# EAGLE board driver (EAGLE 9.5.2)
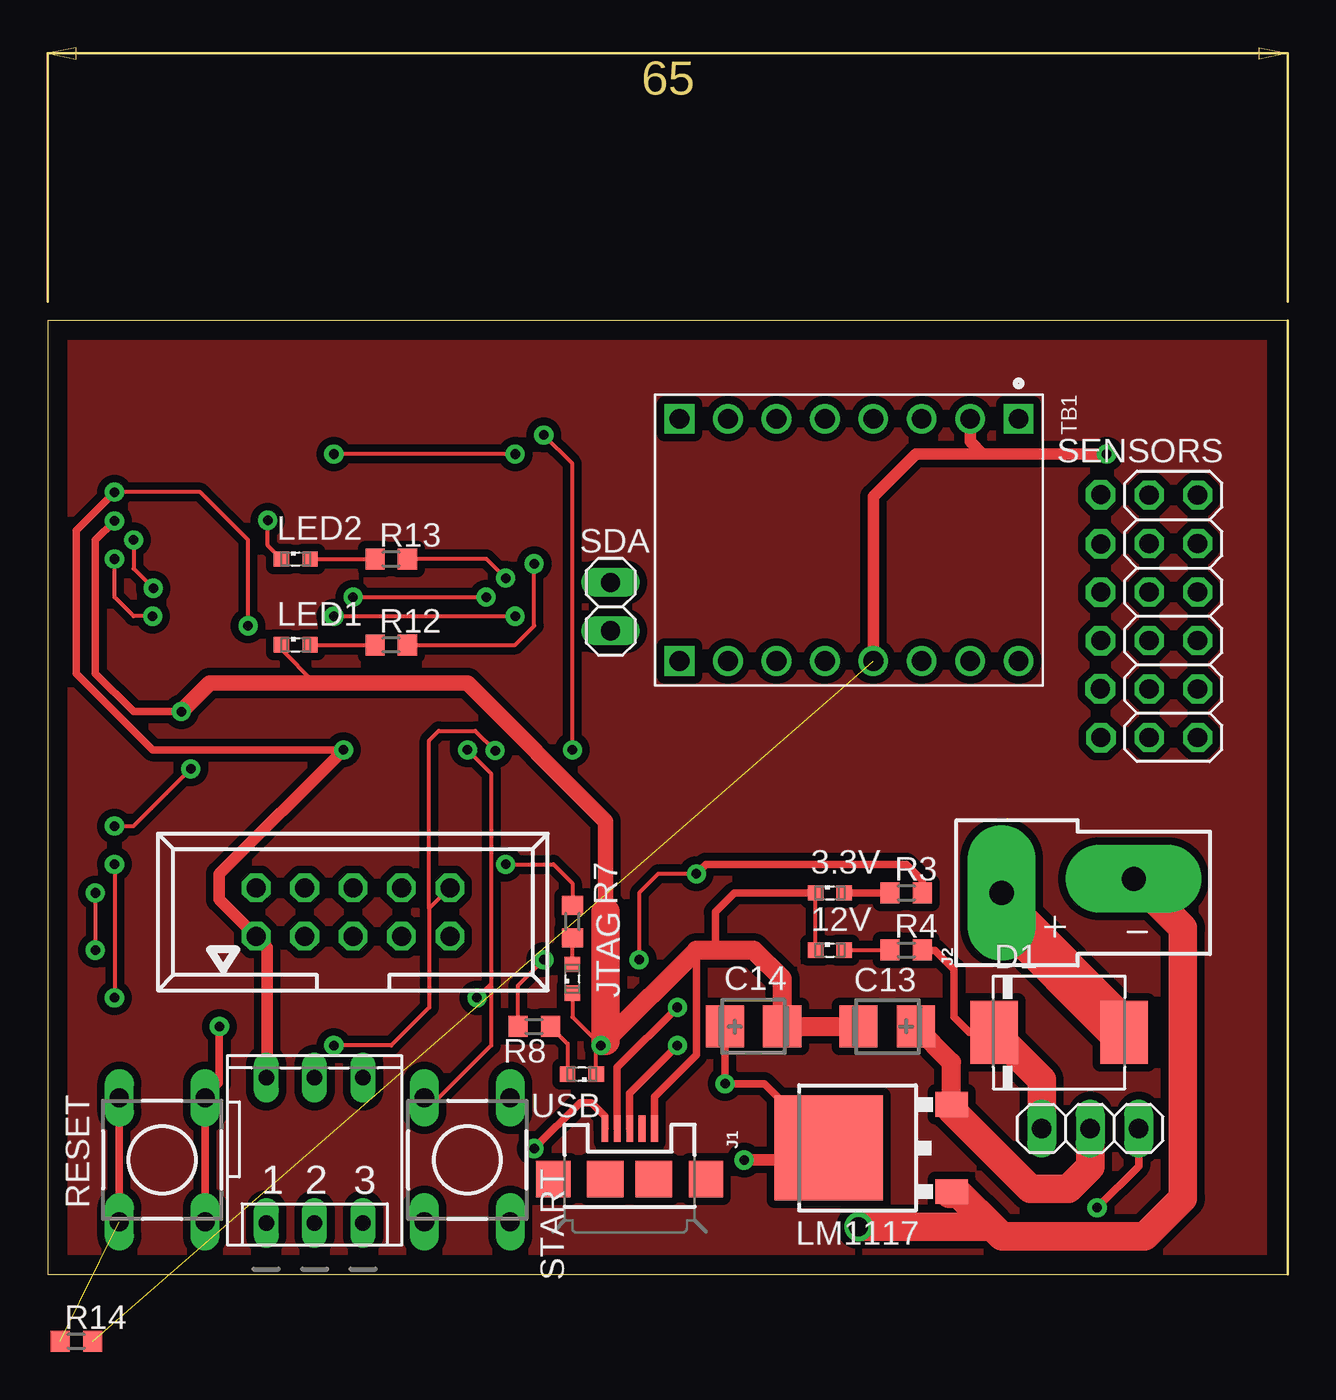
[diagram p0: board, top side]
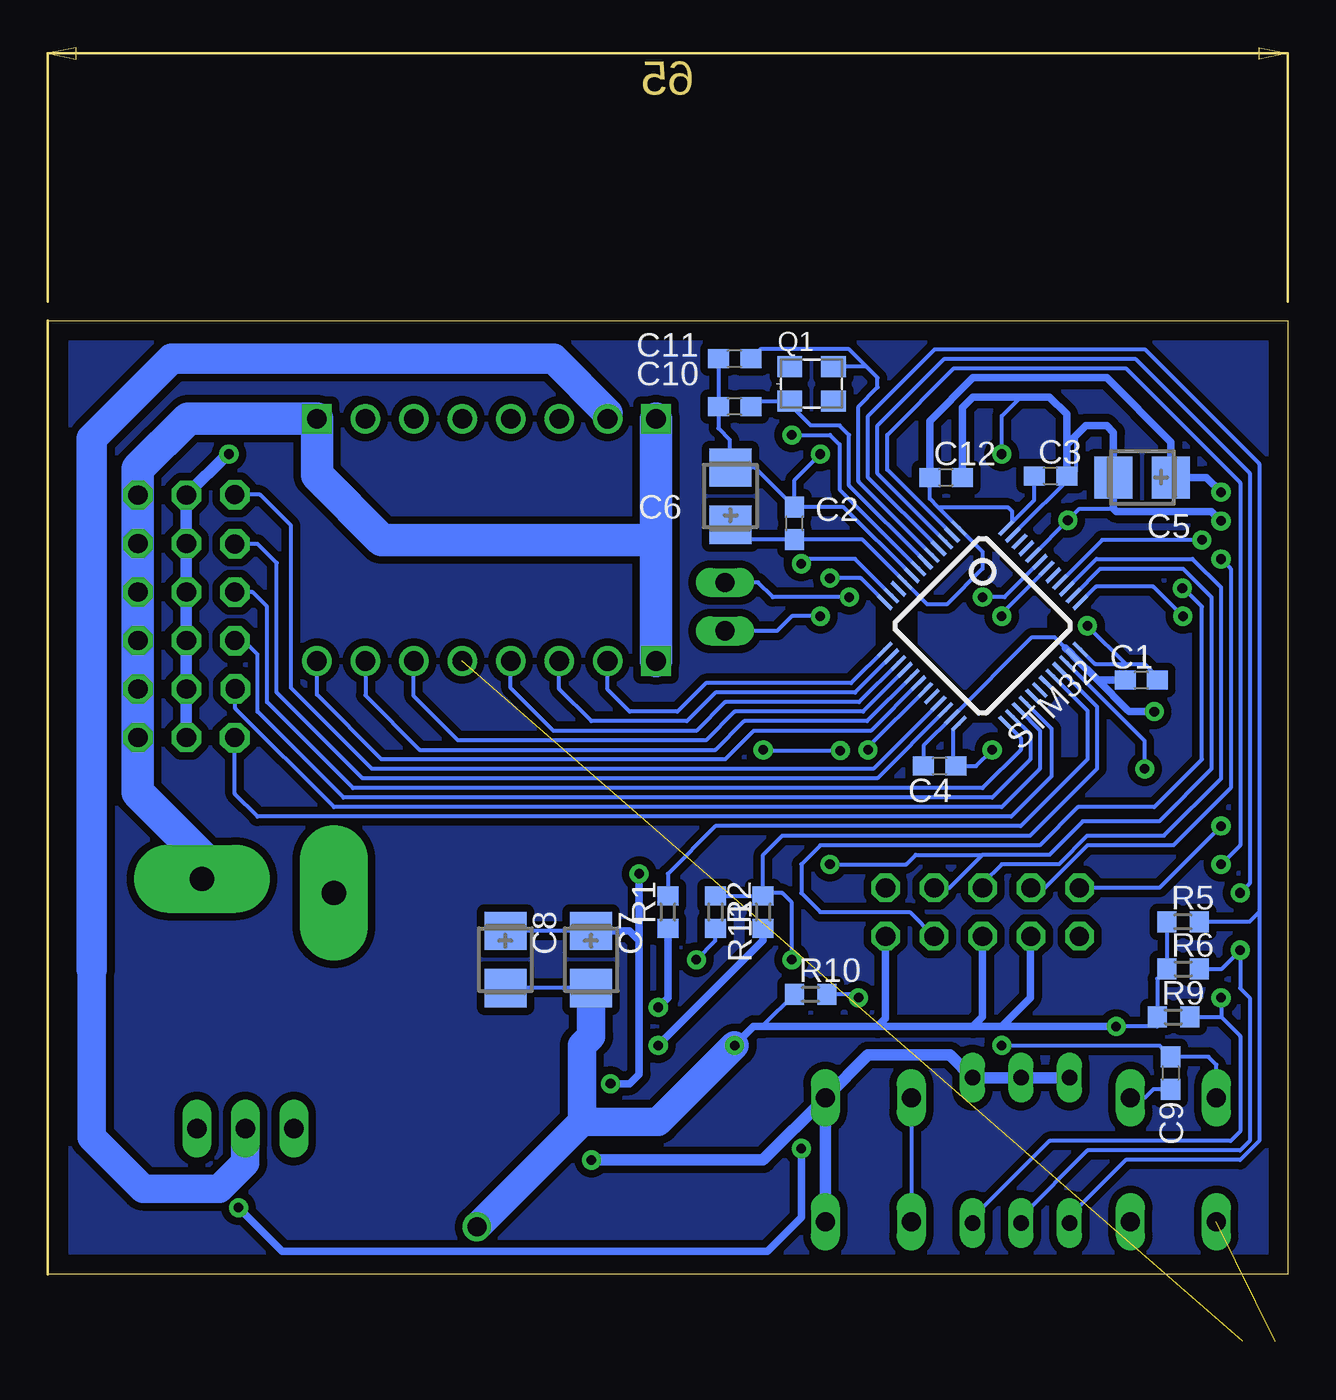
[diagram p1: board, bottom side, seen from below]

Size 65 x 50 mm. Coordinates in mm from the lower left corner, seen from the top.
Outline: 0,0 65,0 65,50 0,50 0,0
Copper layers (1*16): Top 0.035mm / dielectric 1.5mm / Bottom 0.035mm
Design rules "default *": minimum track width 6mil, minimum drill 0.35mm, track to track 0.4mm, track to pad 0.4mm, pad to pad 0.4mm, via to via 0.4mm, smd to smd 0.4mm, copper to edge 40mil, drill to drill 6mil, minimum pad ring 10mil, minimum via ring 8mil, stop-mask expansion 4mil, vias tented up to drill 0mil, thermal gap 10mil

## Footprints (pad centres in the part's own frame; a part is rotated, then mirrored left to right if it is on the bottom)
SML0603 = smd 0.8 x 0.8: A 0.75,0; C -0.75,0
C0603 = smd 1.1 x 1: 1 -0.85,0; 2 0.85,0
CT3528 = smd 2 x 2.2: + -1.5,0; - 1.5,0
DO214AB = smd 2.5 x 3.3: A 3.4,0; C -3.4,0
USB-MICROB = smd 1.4 x 0.35: D+ -2.65,0; D- -2.65,-0.65; GND -2.65,1.3; ID -2.65,0.65; VBUS -2.65,-1.3 | smd 1.9 x 1.8: MT1 0,-4; MT2 0,4 | smd 1.9 x 1.9: P$1 0,-1.27; P$2 0,1.27
DEANS = drill 1.27 pad 3.556 long: + 0,0; - 0.737,-6.921
1X03 = drill 1.016 long: 1 -2.54,0; 2 0,0; 3 2.54,0
TO252 = smd 1.3 x 1.7: 1 -2.285,-4.22; 2 2.285,-4.22 | smd 5.5 x 5.7: 3 0,2.22
3.2X2.5_KX-7 = smd 1.3 x 1.1: 1 -1.15,-0.9; 2 1.15,-0.9; 3 1.15,0.9; 4 -1.15,0.9
R0603 = smd 1 x 1.1: 1 -0.85,0; 2 0.85,0
DTS-6 = drill 1 long: 1 -3.25,2.25; 2 3.25,2.25; 3 -3.25,-2.25; 4 3.25,-2.25
DP-03 = drill 0.813 long: 1 -2.54,-3.81; 2 0,-3.81; 3 2.54,-3.81; 4 2.54,3.81; 5 0,3.81; 6 -2.54,3.81
1X02 = drill 1.016 long: 1 -1.27,0; 2 1.27,0
2X06 = drill 1.016 octagon: 1 -6.35,-1.27; 2 -6.35,1.27; 3 -3.81,-1.27; 4 -3.81,1.27; 5 -1.27,-1.27; 6 -1.27,1.27; 7 1.27,-1.27; 8 1.27,1.27; 9 3.81,-1.27; 10 3.81,1.27; 11 6.35,-1.27; 12 6.35,1.27
TQFP48 = smd 0.2 x 1: 1 -2.75,-4.5; 2 -2.25,-4.5; 3 -1.75,-4.5; 4 -1.25,-4.5; 5 -0.75,-4.5; 6 -0.25,-4.5; 7 0.25,-4.5; 8 0.75,-4.5; 9 1.25,-4.5; 10 1.75,-4.5; 11 2.25,-4.5; 12 2.75,-4.5; 25 2.75,4.5; 26 2.25,4.5; 27 1.75,4.5; 28 1.25,4.5; 29 0.75,4.5; 30 0.25,4.5; 31 -0.25,4.5; 32 -0.75,4.5; 33 -1.25,4.5; 34 -1.75,4.5; 35 -2.25,4.5; 36 -2.75,4.5 | smd 1 x 0.2: 13 4.5,-2.75; 14 4.5,-2.25; 15 4.5,-1.75; 16 4.5,-1.25; 17 4.5,-0.75; 18 4.5,-0.25; 19 4.5,0.25; 20 4.5,0.75; 21 4.5,1.25; 22 4.5,1.75; 23 4.5,2.25; 24 4.5,2.75; 37 -4.5,2.75; 38 -4.5,2.25; 39 -4.5,1.75; 40 -4.5,1.25; 41 -4.5,0.75; 42 -4.5,0.25; 43 -4.5,-0.25; 44 -4.5,-0.75; 45 -4.5,-1.25; 46 -4.5,-1.75; 47 -4.5,-2.25; 48 -4.5,-2.75
SHIELD_POLOLU-713 = drill 1.04 square: 1 -6.35,8.89; 8 -6.35,-8.89; 9 6.35,-8.89 | drill 1.04: 2 -6.35,6.35; 3 -6.35,3.81; 4 -6.35,1.27; 5 -6.35,-1.27; 6 -6.35,-3.81; 7 -6.35,-6.35; 10 6.35,-6.35; 11 6.35,-3.81; 12 6.35,-1.27; 13 6.35,1.27; 14 6.35,3.81; 15 6.35,6.35; 16 6.35,8.89
057-010-1 = drill 1 octagon: 1 -5.08,-1.27; 2 -5.08,1.27; 3 -2.54,-1.27; 4 -2.54,1.27; 5 0,-1.27; 6 0,1.27; 7 2.54,-1.27; 8 2.54,1.27; 9 5.08,-1.27; 10 5.08,1.27

## Placement (x,y rotation side)
3.3V  [SML0603]  41,20 0 top
12V  [SML0603]  41,17 0 top
C1  [C0603]  7.68,31.15 180 bottom
C2  [C0603]  25.85,39.37 90 bottom
C3  [C0603]  12.44,41.85 0 bottom
C4  [C0603]  18.25,26.65 180 bottom
C5  [CT3528]  7.64,41.78 180 bottom
C6  [CT3528]  29.22,40.79 90 bottom
C7  [CT3528]  36.51,16.51 270 bottom
C8  [CT3528]  41.01,16.51 270 bottom
C9  [C0603]  6.15,10.56 270 bottom
C10  [C0603]  29,45.5 180 bottom
C11  [C0603]  29,48 180 bottom
C12  [C0603]  17.92,41.77 0 bottom
C13  10u  [CT3528]  44,13 180 top
C14  10u  [CT3528]  37,13 0 top
D1  S3A  [DO214AB]  53.01,12.69 0 top
J1  [USB-MICROB]  30.5,5 270 top
J2  [DEANS]  50,20 90 top
JP3  [1X03]  54.64,7.65 180 top
JTAG  [SML0603]  27.5,15.5 90 top
LED1  [SML0603]  13,33 0 top
LED2  [SML0603]  13,37.5 0 top
LM1117  LM1117DT-3.3  [TO252]  43.15,6.63 90 top
Q1  [3.2X2.5_KX-7]  24.96,46.69 0 bottom
R1  20  [R0603]  32.5,19 90 bottom
R2  20  [R0603]  27.5,19 90 bottom
R3  65  [R0603]  45,20 0 top
R4  500  [R0603]  45,17.01 0 top
R5  1k  [R0603]  5.5,18.49 0 bottom
R6  1k  [R0603]  5.49,16.01 0 bottom
R7  65  [R0603]  27.5,18.5 90 top
R8  65  [R0603]  25.5,13 180 top
R9  1k  [R0603]  6,13.5 0 bottom
R10  1k  [R0603]  25.01,14.69 0 bottom
R11  1k5  [R0603]  30,19 270 bottom
R12  65  [R0603]  18,33 0 top
R13  65  [R0603]  18,37.5 0 top
R14  1k  [R0603]  1.5,-3.5 0 top  (outside the outline)
RESET  DTS-6  [DTS-6]  6,6.01 90 top
S2  [DP-03]  13.99,6.51 0 top
SDA  [1X02]  29.5,35 90 top
SENSORS  [2X06]  59,34.5 90 top
START  DTS-6  [DTS-6]  21.99,6.01 270 top
STM32  STM32F10XCXT6  [TQFP48]  16,34 225 bottom
TB1  POLOLU-713  [SHIELD_POLOLU-713]  42,38.5 270 top
TCLK  057-010-1  [057-010-1]  16,19 0 top
USB  [SML0603]  28,10.5 180 top

## Library data of the parts
3.3V 12V JTAG LED1 LED2 USB = led; SPICEPREFIX: D
C1-C14 = rcl; SPICEPREFIX: C
D1 = s3x_10; MF: Fairchild; MPN: S3A; OC_FARNELL: 1017803; OC_NEWARK: 58K2395
J1 = SparkFun-Connectors; PROD_ID: CONN-09505; SF_ID: PRT-08533
J2 = SparkFun-Connectors; SF_ID: PRT-11864
JP3 SDA SENSORS = pinhead
LM1117 = lm1117_10; MF: Texas Instruments; MPN: LM1117DT-3.3; OC_FARNELL: 1469048; OC_NEWARK: 41K3430
Q1 = crystal-geyer_V1_0
R1-R14 = rcl; SPICEPREFIX: R
RESET START = switch-tact
S2 = switch-dil; MPN: MCDP03; OC_FARNELL: 1522004; OC_NEWARK: 74M2976
STM32 = stm32
TB1 = POLOLU-713; AVAILABILITY: Unavailable; DESCRIPTION: DC-motor driver; IC: TB6612FNG; 100kHz; 1A; Uin mot: 4.5; MF: Pololu; MP: POLOLU-713; PACKAGE: None; PRICE: None
TCLK = con-panduit; OC_FARNELL: unknown; OC_NEWARK: unknown

## Nets
12V: D1.C JP3.3 R4.2
BAT+: D1.A J2.+
BUT: R10.2 START.3 START.4 STM32.19
D+: R2.2 R8.2 R11.1 STM32.33
D-: R1.2 STM32.32
GND: 3.3V.C 12V.C C1.2 C2.2 C3.2 C4.2 C5.- C6.- C7.- C8.- C9.2 C10.2 C11.2 C12.2 C13.- C14.- J1.GND J2.- JTAG.C LED1.C LED2.C LM1117.1 R5.1 R6.1 R9.1 R10.1 RESET.3 RESET.4 SENSORS.1 SENSORS.3 SENSORS.5 SENSORS.7 SENSORS.9 SENSORS.11 STM32.8 STM32.23 STM32.35 STM32.44 STM32.47 TB1.1 TB1.8 TB1.9 TCLK.3 TCLK.5 TCLK.9 USB.C
LED1: R12.2 STM32.11
LED2: R13.2 STM32.12
MA1: STM32.16 TB1.14
MA2: STM32.17 TB1.15
MB1: STM32.15 TB1.12
MB2: STM32.14 TB1.11
N$1: 3.3V.A R3.1
N$2: 12V.A R4.1
N$3: C11.1 Q1.3 STM32.5
N$4: C10.1 Q1.1 STM32.6
N$5: LED1.A R12.1
N$6: J1.D+ R2.1
N$7: J1.D- R1.1
N$8: LED2.A R13.1
N$10: JTAG.A R7.1
N$11: R8.1 USB.A
N$17: STM32.29
N$42: TB1.5
N$43: TB1.6
N$44: TB1.4
N$45: TB1.3
NRST: C9.1 R14.1 RESET.1 RESET.2 STM32.7 TCLK.10
PC13: R9.2 S2.3 STM32.2
PC14: R6.2 S2.2 STM32.3
PC15: R5.2 S2.1 STM32.4
PWMA: STM32.18 TB1.16
PWMB: STM32.13 TB1.10
S0: STM32.21
S1: STM32.22
S2: STM32.25
S3: STM32.26
S4: STM32.27
S5: STM32.28
SCL: SDA.1 STM32.42
SDA: SDA.2 STM32.43
STAB: C13.+ JP3.2 LM1117.2 TB1.7
TCLK: STM32.37 TCLK.4
TDI: R7.2 STM32.38 TCLK.8
TDO: STM32.39 TCLK.6
TMS: STM32.34 TCLK.2
TRST: STM32.40 TCLK.7
VBUS: J1.VBUS JP3.1
VCC: R14.2 SENSORS.2 SENSORS.4 SENSORS.6 SENSORS.8 SENSORS.10 SENSORS.12 TB1.2 TB1.13
VDD: C1.1 C2.1 C3.1 C4.1 C5.+ C6.+ C7.+ C8.+ C12.1 C14.+ LM1117.3 R3.2 R11.2 S2.4 S2.5 S2.6 START.1 START.2 STM32.1 STM32.9 STM32.24 STM32.36 STM32.48 TCLK.1

## Tracks (layer width: path | path; a pad name or v marks a point on that pad's centre or on a via)
12V
  Top 0.4: R4.2 46.5,17 47.5,16 47.5,13.5 48.31,12.69 D1.C
  Top 1.5: JP3.3 52.1,10.2 D1.C
BAT+
  Top 2.5: D1.A 50,19.1 J2.+
BUT  (via drill 0.5 pad 1)
  Top 0.2: v22,27.5 23.23,26.27 23.23,15.23 | 23.23,15.23 23.24,12 20.47,9.23 19.77,9.23 START.3 | 23.23,15.23 v22.5,14.5
  Bottom 0.2: v22.5,14.5 22.69,14.69 R10.2 | STM32.19 22,27.65 v22,27.5 | START.3 START.4
D+  (via drill 0.5 pad 1)
  Top 0.2: R8.2 24.65,15.15 v26,16.5
  Bottom 0.2: STM32.33 10,29.77 10,26.5 13.5,23 26.5,23 27.5,22 27.5,20 | 27.5,20 R2.2 27.35,20 26.5,20 26,19.5 v26,16.5 | R11.1 27.65,19.85 27.5,20
D-
  Bottom 0.2: STM32.32 10.5,29.56 10.5,27 14,23.5 30,23.5 32.5,21 R1.2
GND  (via drill 0.5 pad 1, 1 pad 1.2)
  Top 0.2: v24.5,43 v15,43 | 14,31 12.25,32.75 LED1.C | 12V.C 3.3V.C | LED2.C 11.53,38.22 v11.53,39.53 | JTAG.C 27.5,13.5 v29,12 28.75,11.75 USB.C
  Top 0.4: 3.3V.C 36,20 35,19 35,17 | RESET.3 RESET.4 9,10.01 v9,13 | v3.5,39.5 2.5,38.5 2.5,31.5 4.5,29.5 v7,29.5 | J1.GND 31.8,9.3 34,11.5 34,17
  Top 0.8: 29.25,19 29.25,23.75 22,31 14,31 8.5,31 v7,29.5
  Top 1: C13.- C14.- 38.5,15.5 37,17 35,17 34,17 29.25,12.25 v29,12 | 47.26,4.24 LM1117.1
  Top 1.5: 47.26,4.24 47.76,4.24 49.5,2.5 | 49.5,2.5 50,2 57.5,2 59.5,4 59.5,18.16 J2.- | 49.5,2.5 v42.5,2.5 | 29.25,12.25 29.25,19
  Bottom 0.2: C4.2 19.1,27.72 STM32.23 13.41,33.41 12.23,33.41 11.66,32.84 | 11.41,32.59 STM32.35 11.16,32.34 | 8.32,29.5 8.41,29.59 | STM32.47 11.09,42.09 11.09,44 | 11.59,43.5 C3.2 | STM32.8 23.28,40.22 C2.2 | C2.2 25.85,41.65 v24.5,43 | v15,43 15,45 14,46 | C2.2 27.92,42.29 C6.- 29.25,42.26 29.25,43.76 29.85,44.35 C10.2 C11.2 | RESET.4 7.49,9.26 7.04,9.71 C9.2 | C7.- C8.- | R5.1 R6.1 6.85,15.5 R9.1 6.85,13 v9,13 | STM32.44 v11.53,39.53 10.92,40.14 9.14,40.14 | R10.1 27.5,13.05 27.5,13
  Bottom 0.4: v7,29.5 8.32,29.5 | 8.41,29.59 9.97,31.15 | 9.97,31.15 C1.2 | 9.97,31.15 11.16,32.34 11.41,32.59 11.66,32.84 | C12.2 17.07,45.43 16.5,46 14,46 12.5,46 11.59,45.09 C3.2 | TCLK.3 13.5,17.69 13.5,14.5 15,13 | 15,13 16.5,13 | 16.5,13 21.5,13 | 21.5,13 27.5,13 28,13 v29,12 | TCLK.5 16,13.5 16.5,13 | TCLK.9 21.08,13.42 21.5,13 | 15,13 v9,13 | 11.59,43.5 11.09,44 10.59,44.5 9.5,44.5 9.14,44.14 C5.- 9.14,40.14 9,40 4,40 v3.5,39.5
  Bottom 1.5: 33.11,38 33.11,39 | 33.11,38 TB1.9 | 33.11,38 33.61,38.5 | v42.5,2.5 37,8 | C7.- 36.51,12.49 37,12 37,8 | 37,8 33,8 v29,12
  Bottom 1.7: J2.- 56.92,21.92 60.27,25.27 SENSORS.1 SENSORS.3 SENSORS.5 SENSORS.7 SENSORS.9 SENSORS.11 60.27,42.23 57.65,44.85 TB1.1 50.89,41.89 47.5,38.5 33.61,38.5 33.11,39 | 33.11,39 TB1.8 | 33.11,39 TB1.9
LED1  (via drill 0.5 pad 1)
  Top 0.2: R12.2 24.5,33 25.5,34 v25.5,37.25
  Bottom 0.2: STM32.11 22.68,37.5 25.25,37.5 v25.5,37.25
LED2  (via drill 0.5 pad 1)
  Top 0.2: v24,36.5 23,37.5 R13.2
  Bottom 0.2: STM32.12 22.39,36.5 v24,36.5
MA1
  Bottom 0.2: TB1.14 45.81,30.31 43.5,28 30.5,28 29,29.5 22.27,29.5 STM32.16
MA2
  Bottom 0.2: STM32.17 22.06,29 28.5,29 30,27.5 45.5,27.5 48.35,30.35 TB1.15
MB1
  Bottom 0.2: TB1.12 40.73,30.73 38.5,28.5 31,28.5 29.5,30 22.48,30 STM32.15
MB2
  Bottom 0.2: TB1.11 38.19,30.69 36.5,29 31.5,29 30,30.5 22.68,30.5 STM32.14
N$1
  Top 0.4: R3.1 3.3V.A
N$2
  Top 0.2: 12V.A R4.1
N$3
  Bottom 0.2: STM32.5 22.5,41.56 22.5,45.5 21.5,46.5 21.5,47 22.09,47.59 | 22.09,47.59 Q1.3 | C11.1 27.65,48.5 23,48.5 22.09,47.59
N$4
  Bottom 0.2: STM32.6 23,41.35 23,44 23.5,44.5 25,44.5 26.11,45.61 Q1.1 27.86,45.79 C10.1
N$5
  Top 0.2: LED1.A R12.1
N$6  (via drill 0.5 pad 1)
  Top 0.4: J1.D+ 30.5,9.5 v33,12
  Bottom 0.4: R2.1 27.5,17.5 v33,12
N$7  (via drill 0.5 pad 1)
  Top 0.4: J1.D- 29.85,10.85 v33,14
  Bottom 0.4: v33,14 32.5,14.5 R1.1
N$8
  Top 0.2: LED2.A R13.1
N$9
  pour Bottom: 0,50 65,50 65,0 0,0
N$10
  Top 0.2: JTAG.A R7.1
N$11
  Top 0.2: R8.1 27.25,12.1 USB.A
N$12
  cutout Bottom: 3,41.5 5,41.5 5,40.5 4,40.5 3,39.5 3.5,39.5 4.5,38.5 3.5,37.5 4,37 4.5,37 5,37.5 5,36.5 6,35.5 6,35 5.5,34.5 3,34.5 2,35.5 2,40.5
N$15
  cutout Bottom: 19,28 19,27.5 19.5,27 20,27.5 20,28 19.5,28.5
N$16
  pour Top (isolate 0.305): 0,50 0,0 65,0 65,50
N$22
  cutout Bottom: 10,26.5 10.5,27 13.5,27 14,27.5 16,25.5 13.5,23
N$24
  cutout Bottom: 21.5,35.5 21.5,33 19.5,33 19.5,35.5
N$25
  cutout Bottom: 14.5,39.5 17.5,39.5 17.5,38 14.5,38
N$26
  cutout Bottom: 15,29 17.5,29 17.5,30.5 15,30.5
N$27
  cutout Bottom: 11,35 10.5,34.5 10.5,33.5 11,33 12,33 12.5,33.5 12.5,34.5 12,35
N$28
  cutout Bottom: 14.5,38.5 11.5,35.5 11.5,35 12.5,35 15,37.5 15,38.5
N$29
  cutout Bottom: 17.5,38.5 20.5,35.5 20.5,35 19.5,35 16.5,38 16.5,38.5
N$30
  cutout Bottom: 20,33.5 16.5,30 17.5,30 20.5,33 20.5,33.5
N$31
  cutout Bottom: 12,33.5 13,33.5 16,30.5 16,30 15.5,29.5 12,33
N$32
  cutout Bottom: 18.5,48.5 17.5,47.5 21,44 22.25,45.25 19,48.5
N$33
  cutout Bottom: 7.5,48.5 1.5,42.5 2.5,41.5 8.5,47.5
N$39
  cutout Top: 15,34.5 15,33 24.5,33 25.5,34 25.5,37 25,36.5 24,36.5 23,35.5 16,35.5
NRST  (via drill 0.5 pad 1)  (1 unrouted)
  Top 0.2: TCLK.10 20,19.19 | 20,19.19 20,14 18,12 v15,12 | 20,19.19 20,28 20.5,28.5 22.41,28.5 v23.45,27.45 | v27.5,27.5 27.5,42.5 v26,44
  Top 0.4: RESET.1 RESET.2
  Bottom 0.2: STM32.7 23.5,41.15 23.5,43.5 24,44 v26,44 | v27.5,27.5 27.45,27.45 v23.45,27.45 | C9.1 6.74,12 v15,12 | C9.1 6.06,11.5 | RESET.2 3.75,11 4.16,11.41 C9.1
PC13  (via drill 0.5 pad 1)
  Top 0.2: v3.5,21.5 v3.5,14.5
  Bottom 0.2: STM32.2 21,42.18 21,44 17.5,47.5 8.5,47.5 2.5,41.5 2.5,22.5 v3.5,21.5 | R9.2 3.5,13.5 | v3.5,14.5 3.5,13.5 | 3.5,13.5 2.5,12.5 2.5,7.5 3,7 12.5,7 16.53,2.97 S2.3
PC14  (via drill 0.5 pad 1)
  Top 0.2: v2.5,20 v2.5,17
  Bottom 0.2: STM32.3 21.5,41.98 21.5,44.5 18,48 8,48 2,42 2,20.5 v2.5,20 | R6.2 3.5,16 v2.5,17 2.5,15 2,14.5 2,7 2.5,6.5 10.5,6.5 14,3 S2.2
PC15
  Bottom 0.2: STM32.4 22,41.77 22,45 18.5,48.5 7.5,48.5 1.5,42.5 1.5,19 | R5.2 2.01,18.49 1.5,19 | 1.5,19 1.5,7 2.5,6 8.5,6 11.5,3 11.5,2.75 S2.1
PWMA
  Bottom 0.2: TB1.16 50.89,30.39 47.5,27 29.5,27 28,28.5 21.85,28.5 STM32.18
PWMB
  Bottom 0.2: TB1.10 35.65,30.65 34.5,29.5 32,29.5 30.5,31 22.89,31 STM32.13
S0  (via drill 1 pad 1.55)
  Bottom 0.2: STM32.21 21.73,26.5 48,26.5 52.25,30.75 52.25,39.25 53.87,40.87 v55.19,40.87
S1  (via drill 1 pad 1.55)
  Bottom 0.2: STM32.22 21.52,26 48.5,26 53,30.5 53,37.29 54,38.29 v55.19,38.29
S2  (via drill 1 pad 1.55)
  Bottom 0.2: STM32.25 14,28.11 14,27.5 16,25.5 49,25.5 53.5,30 53.5,34.5 53.5,35 54.26,35.76 v55.19,35.76
S3  (via drill 1 pad 1.55)
  Bottom 0.2: STM32.26 13.5,28.32 13.5,27 15.5,25 49.5,25 54,29.5 54,32.5 54.72,33.22 v55.19,33.22
S4  (via drill 1 pad 1.55)
  Bottom 0.2: STM32.27 13,28.52 13,26.5 15,24.5 50,24.5 55.17,29.67 v55.17,30.7
S5  (via drill 1 pad 1.55)
  Bottom 0.2: STM32.28 12.38,28.62 12.38,26.12 14.5,24 54,24 55.2,25.2 v55.2,28.14
SCL  (via drill 0.5 pad 1)
  Top 0.2: v15,34.5 v24.5,34.5
  Bottom 0.2: STM32.42 15,34.65 v15,34.5 | v24.5,34.5 26,34.5 26.77,33.73 SDA.1
SDA  (via drill 0.5 pad 1)
  Top 0.2: v16,35.5 v22.98,35.5
  Bottom 0.2: STM32.43 14.85,35.5 v16,35.5 | SDA.2 27.77,36.27 27,35.5 v22.98,35.5
STAB
  Top 1: LM1117.2 47.37,11.13 C13.+
  Top 1.5: LM1117.2 47.37,8.63 51.5,4.5 53.5,4.5 54.64,5.64 JP3.2
  Bottom 1.5: 62.68,16 62.68,7.18 60,4.5 56,4.5 54.64,5.86 JP3.2 | 35.65,45.15 TB1.7
  Bottom 1.6: 62.68,16 62.68,43.82 58.5,48 38.5,48 35.65,45.15
TCLK  (via drill 0.5 pad 1)
  Top 0.2: v3.5,37.5 3.5,35.5 4.5,34.5 v5.5,34.5
  Bottom 0.2: v3.5,37.5 3,37 3,25.5 6,22.5 10.5,22.5 12.73,20.27 TCLK.4 | STM32.37 10.05,36.05 7.05,36.05 v5.5,34.5
TDI  (via drill 0.5 pad 1)
  Top 0.2: v24,21.5 26.5,21.5 27.5,20.5 R7.2
  Bottom 0.2: TCLK.8 17.73,20.27 16,22 | 16,22 12.5,22 10.75,23.75 6.75,23.75 4,26.5 4,35.5 5.5,37 9.82,37 STM32.38 | v24,21.5 20,21.5 19.5,22 16,22
TDO
  Bottom 0.2: STM32.39 10.03,37.5 5,37.5 3.5,36 3.5,26 6.5,23 10.5,23 12,21.5 15,21.5 16,20.5 TCLK.6
TMS  (via drill 0.5 pad 1)
  Top 0.2: v7.5,26.5 4.5,23.5 v3.5,23.5
  Bottom 0.2: v7.5,26.5 7.5,27.98 STM32.34 | TCLK.2 6.73,20.27 v3.5,23.5
TRST  (via drill 0.5 pad 1)
  Top 0.2: v4.5,38.5 4.5,37 v5.53,35.97
  Bottom 0.2: v5.53,35.97 5.47,35.97 4.5,35 4.5,27 7,24.5 11,24.5 13,22.5 24.5,22.5 25.5,21.5 25.5,20 24.5,19 19.81,19 TCLK.7 | v4.5,38.5 9.73,38.5 STM32.40
VBUS  (via drill 0.5 pad 1)
  Top 0.4: JP3.1 57.18,5.68 v55,3.5 | v25.5,6.6 27.9,9 28.5,9 29.2,8.3 J1.VBUS
  Bottom 0.4: v55,3.5 52.72,1.22 27.28,1.22 25.5,3 v25.5,6.6
VCC  (via drill 0.5 pad 1)  (1 unrouted)
  Top 0.6: v55.5,43 49,43 | 49,43 48.35,43.65 TB1.2 | 49,43 45.5,43 43.27,40.77 TB1.13
  Bottom 0.6: SENSORS.2 SENSORS.4 SENSORS.6 SENSORS.8 SENSORS.10 SENSORS.12 55.58,43 v55.5,43
VDD  (via drill 0.5 pad 1)
  Top 0.2: v10.5,34 10.5,38.5 8,41 v3.5,41 | v34,21 32,21 31,20 v31,16.5
  Top 0.4: 38,6 40.3,6 LM1117.3 37.56,10 v35.5,10 C14.+ | v34,21 34.5,21.5 45,21.5 45.85,20.65 R3.2 | v3.5,41 1.5,39 1.5,31.5 5.5,27.5 v15.5,27.5
  Top 0.6: v15.5,27.5 9,21 9,19.65 TCLK.1 11.5,17.15 11.5,10.37 S2.6 | v36.5,6 38,6
  Bottom 0.2: STM32.24 17.55,28.55 17.55,27.16 17.4,27 C4.1 16.35,26.65 v15.5,27.5 | STM32.36 10.11,32 8.5,32 | 8.5,32 7.5,32 6.83,31.33 C1.1 | STM32.48 14.45,39.45 | 14.45,39.45 13.29,40.6 C3.1 | C12.1 18.77,40.66 18.3,40.2 | 18.3,40.2 STM32.1 16,37.89 16,37 17.88,35.12 18.88,35.12 STM32.9 22.29,38.52 C2.1 28.45,38.52 C6.+ | C7.+ C8.+ | 14.45,39.45 14.45,40 14.64,40.2 18.3,40.2 | v10.5,34 8.5,32 | v31,16.5 30,17.5 R11.2
  Bottom 0.4: C12.1 18.77,44.73 16.5,47 9.5,47 6.14,43.64 C5.+ 4.28,41.78 v3.5,41 | v35.5,10 34.5,10 34,10.5 34,17.5 | 34,17.5 34.51,18.01 C7.+ | v34,21 34,17.5
  Bottom 0.6: START.1 START.2 | S2.6 S2.5 S2.4 17.71,11.5 22,11.5 START.1 | v36.5,6 27.5,6 START.1